# EAGLE board RHD2216_headstage_oldeagle_4 (EAGLE 9.2.2)

Size 29 x 29.7 mm. Coordinates in mm from the lower left corner, seen from the top.
Outline: 0,0 29,0 29,29.7 0,29.7 0,0
Copper layers (1*16): Top 0.035mm / dielectric 1.5mm / Bottom 0.035mm
Design rules "default": minimum track width 6mil, minimum drill 0.35mm, track to track 6mil, track to pad 6mil, pad to pad 6mil, via to via 6mil, smd to smd 6mil, copper to edge 40mil, drill to drill 6mil, minimum pad ring 10mil, minimum via ring 8mil, stop-mask expansion 4mil, vias tented up to drill 0mil, thermal gap 10mil
Net classes: 1 thick: width 1.016 mm; 2 power: width 0.61 mm

## Footprints (pad centres in the part's own frame; a part is rotated, then mirrored left to right if it is on the bottom)
0402 = smd 0.686 x 0.762: 1 -0.533,0; 2 0.533,0
C0402 = smd 0.7 x 0.9: 1 -0.65,0; 2 0.65,0
TESTPOINT_SMALL = drill 0.813 octagon: 1 0,0
0204/5 = drill 0.813 octagon: 1 -2.54,0; 2 2.54,0
INDC1608X95 = smd 0.85 x 0.7: 1 -0.775,0; 2 0.775,0
QFN56_8_X_8_LARGE = smd 0.9 x 0.25: 1 -4.05,3.25; 2 -4.05,2.75; 3 -4.05,2.25; 4 -4.05,1.75; 5 -4.05,1.25; 6 -4.05,0.75; 7 -4.05,0.25; 8 -4.05,-0.25; 9 -4.05,-0.75; 10 -4.05,-1.25; 11 -4.05,-1.75; 12 -4.05,-2.25; 13 -4.05,-2.75; 14 -4.05,-3.25; 29 4.05,-3.25; 30 4.05,-2.75; 31 4.05,-2.25; 32 4.05,-1.75; 33 4.05,-1.25; 34 4.05,-0.75; 35 4.05,-0.25; 36 4.05,0.25; 37 4.05,0.75; 38 4.05,1.25; 39 4.05,1.75; 40 4.05,2.25; 41 4.05,2.75; 42 4.05,3.25 | smd 0.25 x 0.9: 15 -3.25,-4.05; 16 -2.75,-4.05; 17 -2.25,-4.05; 18 -1.75,-4.05; 19 -1.25,-4.05; 20 -0.75,-4.05; 21 -0.25,-4.05; 22 0.25,-4.05; 23 0.75,-4.05; 24 1.25,-4.05; 25 1.75,-4.05; 26 2.25,-4.05; 27 2.75,-4.05; 28 3.25,-4.05; 43 3.25,4.05; 44 2.75,4.05; 45 2.25,4.05; 46 1.75,4.05; 47 1.25,4.05; 48 0.75,4.05; 49 0.25,4.05; 50 -0.25,4.05; 51 -0.75,4.05; 52 -1.25,4.05; 53 -1.75,4.05; 54 -2.25,4.05; 55 -2.75,4.05; 56 -3.25,4.05 | smd 4.8 x 4.8: CENTER 0,0
QFN-48 = smd 0.7 x 0.25: 1 -3.4,2.75; 2 -3.4,2.25; 3 -3.4,1.75; 4 -3.4,1.25; 5 -3.4,0.75; 6 -3.4,0.25; 7 -3.4,-0.25; 8 -3.4,-0.75; 9 -3.4,-1.25; 10 -3.4,-1.75; 11 -3.4,-2.25; 12 -3.4,-2.75; 25 3.4,-2.75; 26 3.4,-2.25; 27 3.4,-1.75; 28 3.4,-1.25; 29 3.4,-0.75; 30 3.4,-0.25; 31 3.4,0.25; 32 3.4,0.75; 33 3.4,1.25; 34 3.4,1.75; 35 3.4,2.25; 36 3.4,2.75 | smd 0.25 x 0.7: 13 -2.75,-3.4; 14 -2.25,-3.4; 15 -1.75,-3.4; 16 -1.25,-3.4; 17 -0.75,-3.4; 18 -0.25,-3.4; 19 0.25,-3.4; 20 0.75,-3.4; 21 1.25,-3.4; 22 1.75,-3.4; 23 2.25,-3.4; 24 2.75,-3.4; 37 2.75,3.4; 38 2.25,3.4; 39 1.75,3.4; 40 1.25,3.4; 41 0.75,3.4; 42 0.25,3.4; 43 -0.25,3.4; 44 -0.75,3.4; 45 -1.25,3.4; 46 -1.75,3.4; 47 -2.25,3.4; 48 -2.75,3.4 | smd 5.15 x 5.15: EP 0,0
DN007+0 = smd 0.46 x 1: FEED 2.22,-2.8 | smd 1.01 x 0.74: GND -1.16,-2.93; GND@1 1.035,-2.93

## Placement (x,y rotation side)
C1  100n  [0402]  7.6,10.5 0 top
C2  10n  [0402]  4.76,10.48 0 top
C3  0.1uF  [C0402]  1.7,-3.1 0 top  (outside the outline)
C4  0.1uF  [C0402]  1.5,-6.3 0 top  (outside the outline)
C5  0.1uF  [C0402]  1.5,-10 0 top  (outside the outline)
C6  22uF  [C0402]  1.5,-13.7 0 top  (outside the outline)
C7  0.1uF  [C0402]  1.5,-17.4 0 top  (outside the outline)
C8  22uF  [C0402]  1.5,-21.1 0 top  (outside the outline)
C9  0.1uF  [C0402]  1.5,-24.8 0 top  (outside the outline)
C10  0.1uF  [C0402]  1.5,-28.5 0 top  (outside the outline)
C11  1.8pF  [C0402]  1.5,-40.7 0 top  (outside the outline)
C12  12pF  [C0402]  1.5,-44.4 0 top  (outside the outline)
C13  1pF  [C0402]  1.5,-60.5 0 top  (outside the outline)
C14  1pF  [C0402]  1.5,-71.1 0 top  (outside the outline)
C15  1pF  [C0402]  1.5,-76.2 0 top  (outside the outline)
C16  12pF  [C0402]  1.5,-86.8 0 top  (outside the outline)
C17  1uF  [C0402]  1.5,-91.9 0 top  (outside the outline)
GND  TESTPOINT_SMALL  [TESTPOINT_SMALL]  1.94,10.21 0 top
L1  6.8uH  [0204/5]  3.4,-32.2 0 top  (outside the outline)
L2  BLM18HE152SN1D  [INDC1608X95]  2,-36.4 0 top  (outside the outline)
L3  2nH  [0204/5]  3.4,-49.5 0 top  (outside the outline)
L4  2nH  [0204/5]  3.4,-55 0 top  (outside the outline)
L5  2.4nH  [0204/5]  3.4,-65.6 0 top  (outside the outline)
L6  2.4nH  [0204/5]  3.4,-81.3 0 top  (outside the outline)
U2  RHD2216_QFN  [QFN56_8_X_8_LARGE]  12.76,6.58 0 top
U$1  CC2652R1  [QFN-48]  21.62,16.25 0 top
U$2  INVERTED_F_ANTENNA+0  [DN007+0]  10,24.9 0 top
VDD  TESTPOINT_SMALL  [TESTPOINT_SMALL]  1.95,8.11 0 top

## Library data of the parts
C1 C2 GND VDD = RHD2000_eval_board
C3-C17 = adafruit
L1 L3-L6 = rcl; SPICEPREFIX: L
L2 = BLM18HE152SN1D; DIGI-KEY_PART_NUMBER: 490-5216-1-ND; DIGI-KEY_PURCHASE_URL: https://www.digikey.com/product-detail/en/murata-electronics-north-america/BLM18HE152SN1D/490-5216-1-ND/1948392?utm_source=snapeda&utm_medium=aggregator&utm_campaign=symbol; MF: Murata Electronics; MP: BLM18HE152SN1D; PACKAGE: 0603 Samtec
U2 = RHD2000
U$1 = CC2652R1
U$2 = antenna

## Nets
DCDC_SW: L1.1 U$1.33
GND: C1.2 C2.2 C3.2 C4.2 C5.2 C6.2 C7.2 C8.2 C9.2 C10.2 C11.2 C13.2 C15.2 C16.2 C17.1 GND.1 U2.2 U2.4 U2.6 U2.8 U2.10 U2.11 U2.12 U2.17 U2.29 U2.30 U2.32 U2.34 U2.36 U2.38 U2.40 U2.42 U2.44 U2.46 U2.48 U2.50 U2.52 U2.54 U2.56 U2.CENTER U$2.GND U$2.GND@1
N$1: U2.23 U$1.15
N$2: U2.25 U$1.14
N$3: U2.19 U$1.12
N$4: U2.21 U$1.16
N$5: C3.1 C4.1 C5.1 C6.1 C7.1 L2.2
N$6: C11.1 C12.2
N$7: C12.1 L3.2
N$8: C13.1 L3.1 L4.2
N$9: C14.2 L4.1 L5.2
N$10: C17.2 U$1.23
N$12: C16.1 L6.2
N$42: C2.1 U2.28
RF_N: C15.1 L5.1
RF_P: C14.1 L6.1
VCC: C1.1 U2.13 U2.26 U2.31 VDD.1
VDDR: C8.1 C9.1 C10.1 L1.2 U$1.45 U$1.48
VDDS: U$1.13 U$1.22 U$1.34 U$1.44
WMCU_VDD: L2.1

## Tracks (layer width: path | path; a pad name or v marks a point on that pad's centre or on a via)
DCDC_SW  (1 unrouted)
GND  (41 unrouted)
N$1  (1 unrouted)
N$2  (1 unrouted)
N$3  (1 unrouted)
N$4  (1 unrouted)
N$5  (5 unrouted)
N$6  (1 unrouted)
N$7  (1 unrouted)
N$8  (2 unrouted)
N$9  (2 unrouted)
N$10  (1 unrouted)
N$12  (1 unrouted)
N$42  (1 unrouted)
RF_N  (1 unrouted)
RF_P  (1 unrouted)
VCC  (4 unrouted)
VDDR  (5 unrouted)
VDDS  (3 unrouted)